# Altium PCB BLDC1.PcbDoc
Units mil, origin at the board's own origin, x right, y up, seen from the top; angles counter-clockwise.
Board outline 6000 x 4000 mil, 2 copper layers (Top Layer, Bottom Layer); 92 components, 65 nets, 304 pads, 249 vias.
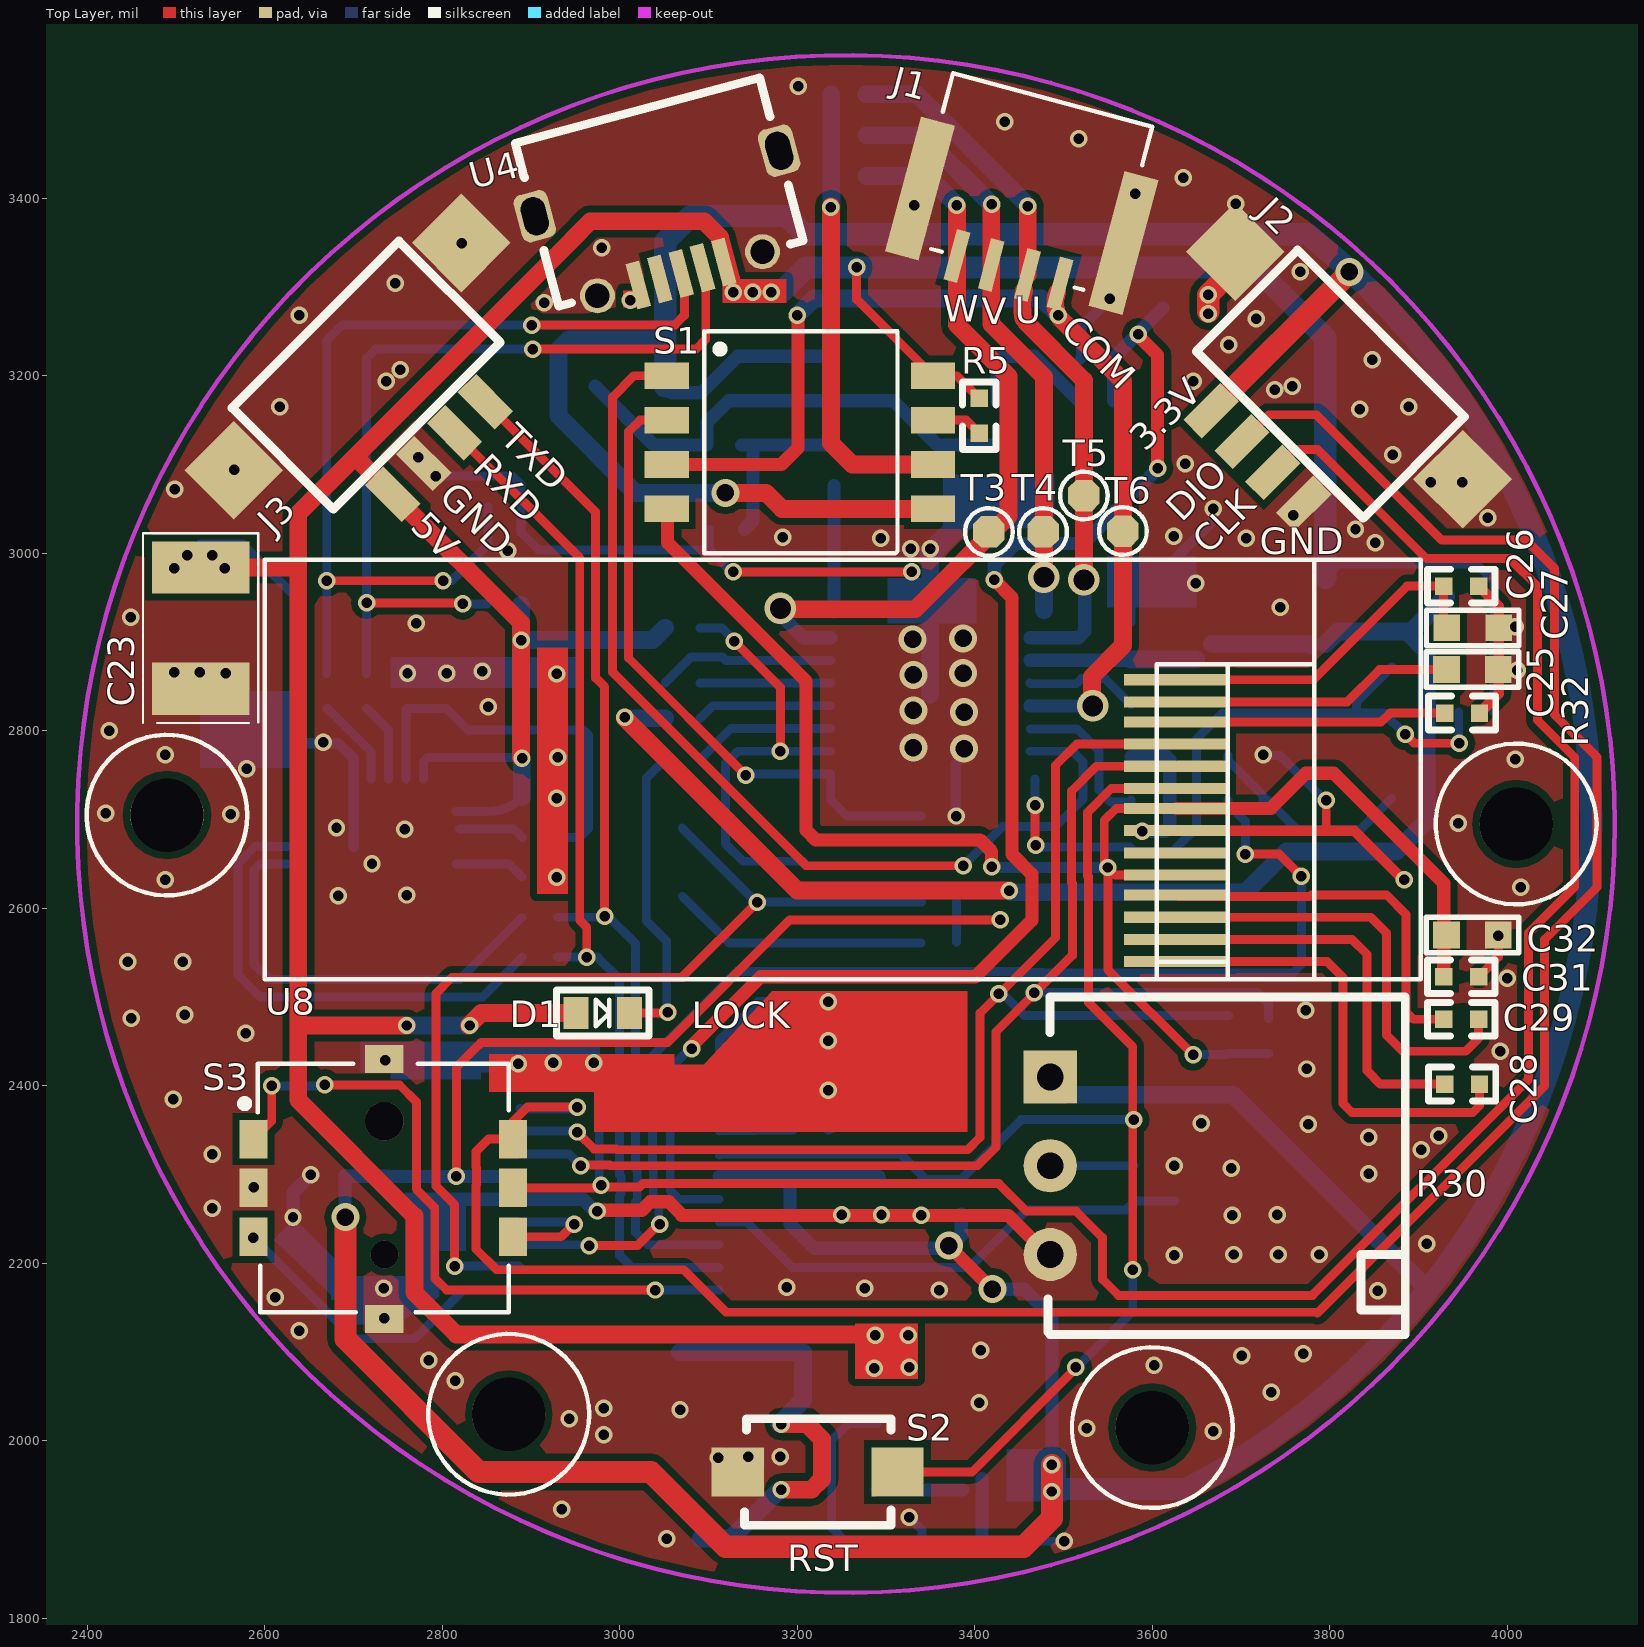
[diagram p0: Top Layer view]
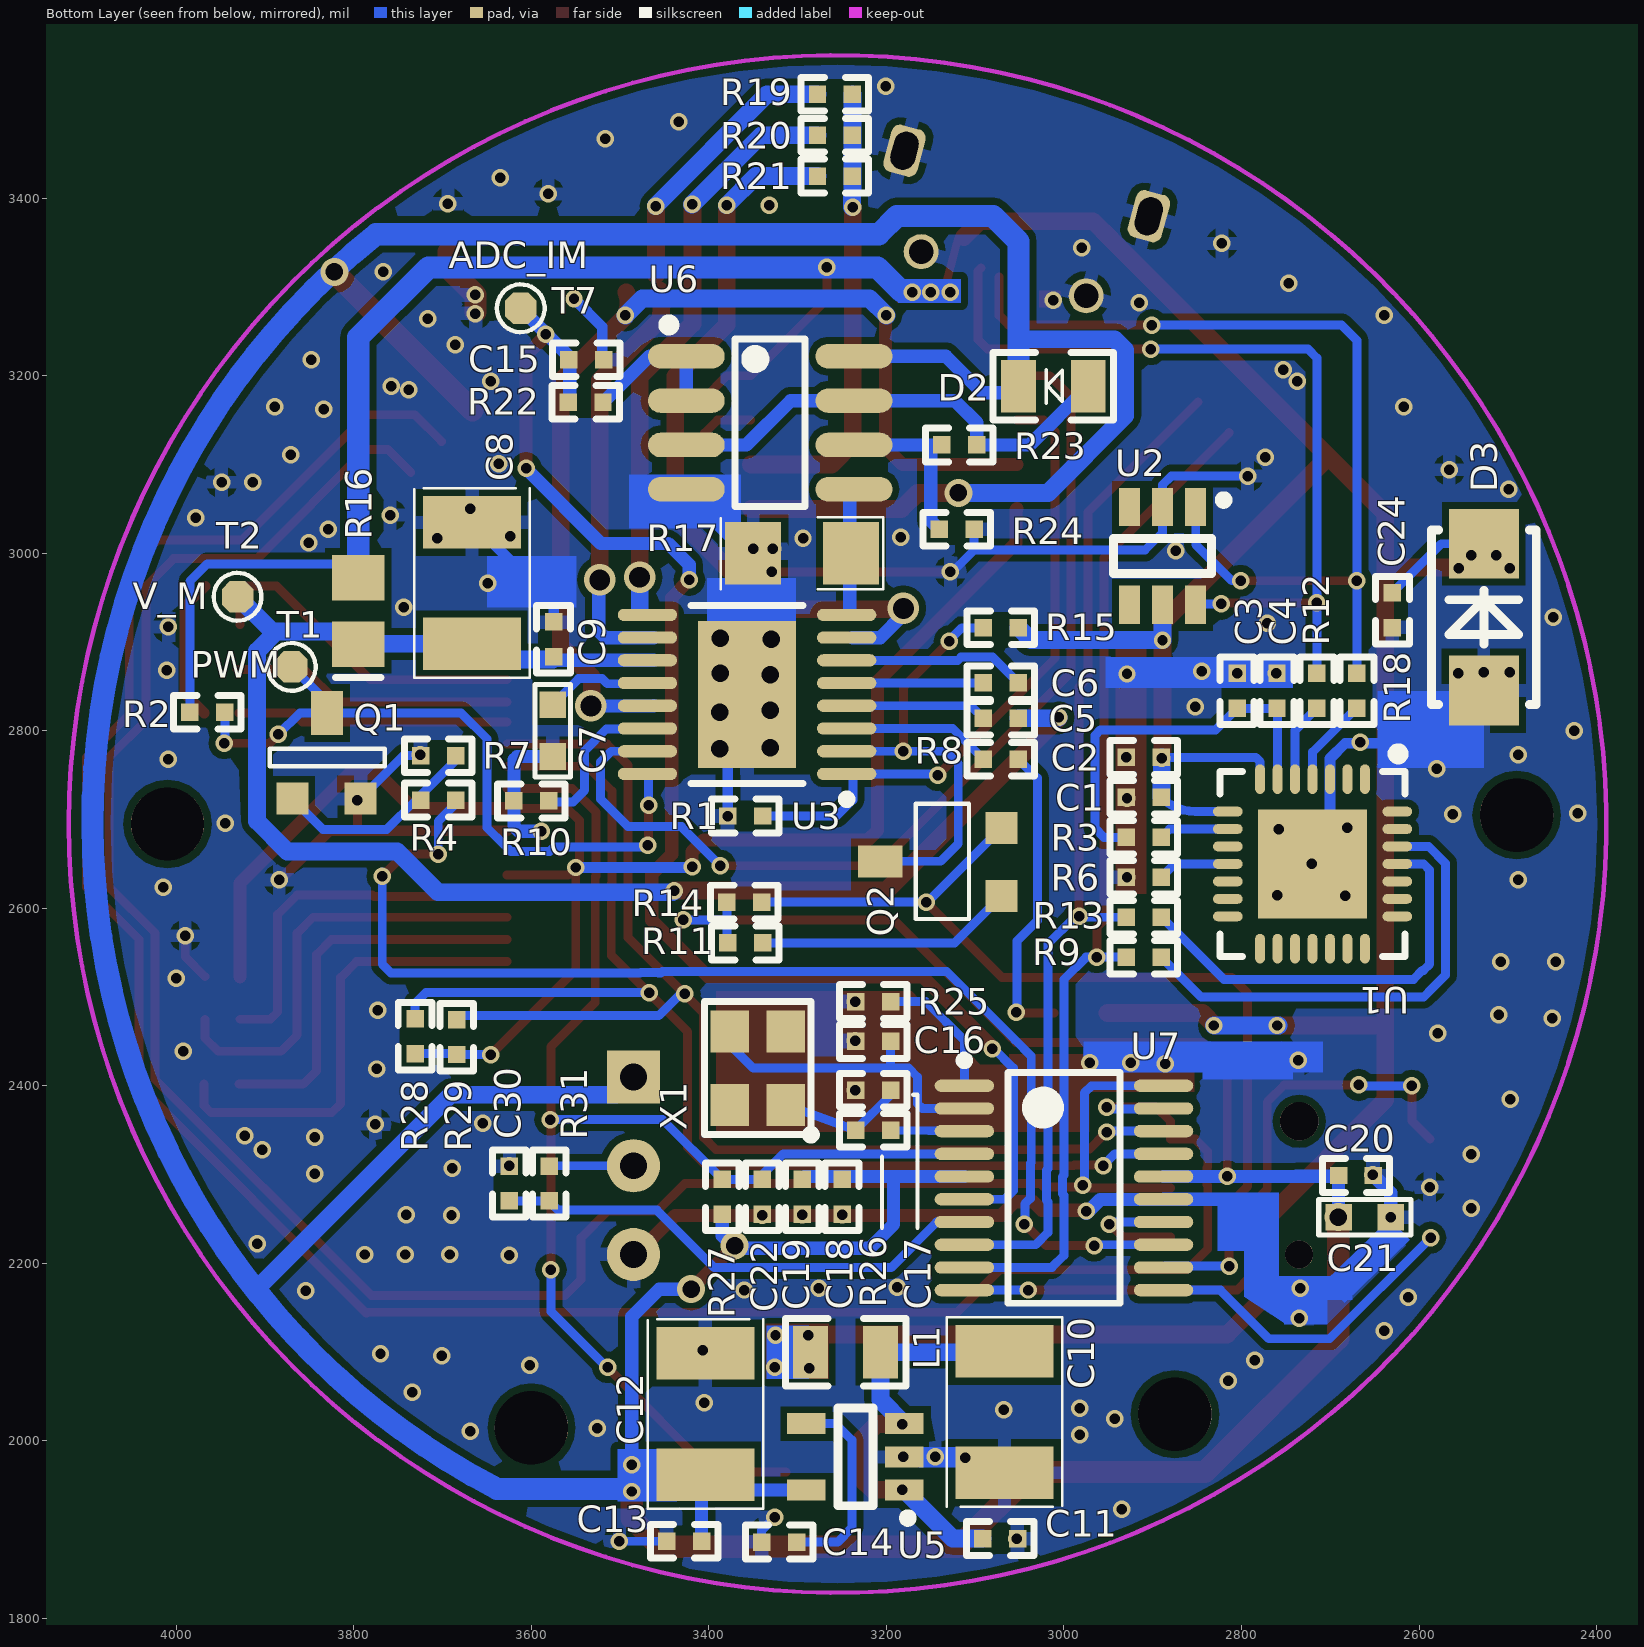
[diagram p1: Bottom Layer view, seen from below]

## Layer stack, top to bottom
Top Layer: signal copper 1.4
Dielectric: dielectric 12.6, FR-4, Dk 4.8
Bottom Layer: signal copper 1.4

## Board outline
1000,1000 7000,1000 7000,5000 1000,5000

## Design rules (kind name [scope] priority, off if disabled: settings)
Clearance [All] p1: gap=8
PlaneConnect [All] p1: planeconnectstyle=Direct reliefexpansion=20 reliefentries=4 reliefconductorwidth=15 reliefairgap=10
PolygonConnect [All] p1: connectstyle=Direct reliefconductorwidth=15 reliefentries=4 polygonreliefangle="90 Angle"
RoutingVias [All] p1: holewidth=28 width=50 viastyle="Through Hole" minholewidth=28 minwidth=50 maxholewidth=28 maxwidth=50
SilkscreenOverComponentPads [All] p1: minsilkscreentomaskgap=10
SolderMaskExpansion [All] p1: expansion=4
TestPointUsage [All] p1: valid=0 allowmultiple=FALSE
Testpoint [All] p1: side=15 testpointundercomponent=TRUE minsize=40 maxsize=100 preferedsize=60 minholesize=0 maxholesize=40 preferedholesize=32 testpointgrid=1 style=1023 order=0-112345678
Width [All] p1: maxlimit=50 minlimit=8 preferedwidth=10
22 further rules are at their usual default settings.

## Components (designator, comment, footprint, x,y, rotation, side; value= is the part's Value field where it differs from the comment)
C1 "Cap1" C0402 2910,2725 r180 bottom
C2 "Cap1" C0402 2910,2770 r180 bottom
C3 "Cap1" C0402 2805,2845 r270 bottom
C4 "Cap1" C0402 2760,2845 r270 bottom
C5 "Cap1" C0402 3071,2814 r180 bottom
C6 "Cap1" C0402 3071,2854 r180 bottom
C7 "Cap1" 0603 3576,2798 r90 bottom
C8 "Cap_Pol" 3528(22u16V钽电容) 3667,2898 r0 bottom
C9 "Cap1" C0402 3575,2903 r270 bottom
C10 "Cap_Pol" 3528(22u16V钽电容) 3067,2101 r180 bottom
C11 "Cap1" C0402 3072,1890 r0 bottom
C12 "Cap_Pol" 3528(22u16V钽电容) 3404,1962 r0 bottom
C13 "Cap1" C0402 3428,1887 r180 bottom
C14 "Cap1" C0402 3321,1886 r180 bottom
C15 "Cap1" C0402 3538,3218 r0 bottom
C16 "Cap1" C0402 3215,2450 r180 bottom
C17 "Cap1" C0402 3215,2395 r180 bottom
C18 "Cap1" C0402 3250,2275 r90 bottom
C19 "Cap1" C0402 3295,2275 r90 bottom
C20 "Cap1" C0402 2671,2299 r0 bottom
C21 "Cap1" 0603 2659,2252 r0 bottom
C22 "Cap1" C0402 3340,2275 r90 bottom
C23 "Cap_Pol" 3528(22u16V钽电容) 2528,2984 r0 top
C24 "Cap1" C0402 2630,2936 r90 bottom
C25 "Cap1" 0603 3963,2869 r180 top
C26 "Cap1" C0402 3948,2963 r0 top
C27 "Cap1" 0603 3959,2916 r0 top
C28 "Cap1" C0402 3949,2402 r180 top
C29 "Cap1" C0402 3948,2475 r0 top
C30 "Cap1" C0402 3625,2290 r270 bottom
C31 "Cap1" C0402 3948,2523 r180 top
C32 "Cap1" 0603 3963,2570 r180 top
D1 "LED" DIODE-12 2981,2482 r0 top
D2 "S4" Diode-0805 3012,3188 r0 bottom
D3 "SS34" LC-SMA(DO-214AC)_S2 2527,2928 r270 bottom
J1 "SH1.0mm 4P" "SH1.0 4P" 3380,3335 r345 top
J2 "MH1.25*4" MH1.25*4立式表贴 3770,3160 r135 top locked
J3 "MH1.25*4" MH1.25*4立式表贴 2745,3170 r225 top locked
L1 "BLM18" CC0805 3246,2100 r180 bottom
Q1 "8050" SOT-23-3 3830,2820 r180 bottom
Q2 "NMOS AO3400" "SOT-23-3 - AO3400" 3167,2653 r90 bottom
R1 "Res1" C0402 3359,2704 r180 bottom
R2 "Res1" C0402 3965,2821 r0 bottom
R3 "Res1" C0402 2910,2680 r0 bottom
R4 "Res1" C0402 3705,2722 r0 bottom
R5 "Res1" C0402 3405,3155 r270 top
R6 "Res1" C0402 2910,2635 r0 bottom
R7 "Res1" C0402 3705,2772 r180 bottom
R8 "Res1" C0402 3071,2768 r180 bottom
R9 "Res1" C0402 2910,2545 r0 bottom
R10 "Res1" C0402 3600,2721 r0 bottom
R11 "Res1" C0402 3359,2561 r180 bottom
R12 "Res1" C0402 2715,2845 r270 bottom
R13 "Res1" C0402 2910,2590 r0 bottom
R14 "Res1" C0402 3360,2607 r0 bottom
R15 "Res1" C0402 3071,2916 r180 bottom
R16 "Res1" C0805 3795,2935 r90 bottom
R17 "Res1" 3216[1206] 3295,3000 r0 bottom
R18 "Res1" C0402 2670,2845 r270 bottom
R19 "Res1" C0402 3258,3517 r180 bottom
R20 "Res1" C0402 3258,3471 r180 bottom
R21 "Res1" C0402 3258,3425 r180 bottom
R22 "Res1" C0402 3539,3170 r180 bottom
R23 "Res1" C0402 3118,3122 r0 bottom
R24 "Res1" C0402 3121,3027 r180 bottom
R25 "Res1" C0402 3215,2495 r0 bottom
R26 "Res1" C0402 3215,2350 r0 bottom
R27 "Res1" C0402 3385,2275 r90 bottom
R28 "Res1" C0402 3731,2456 r270 bottom
R29 "Res1" C0402 3684,2455 r270 bottom
R30 "10k 3296W" "3296W 卧式" 3485,2410 r0 top locked
R31 "Res1" C0402 3580,2290 r90 bottom
R32 "Res1" C0402 3949,2820 r0 top
S1 "拨码开关4路 1.27mm" 拨码开关4路 3053,3200 r0 top locked
S2 "SW-3*4mm" SW-3*4mm 3143,2025 r0 top
S3 "五向开关" 五向开关 2735,2285 r0 top locked
T1 "TEST" TEST 3870,2872 r180 bottom
T2 "TEST" TEST 3931,2951 r180 bottom
T3 "TEST" TEST 3416,3024 r0 top
T4 "TEST" TEST 3477,3024 r0 top
T5 "TEST" TEST 3523,3065 r0 top
T6 "TEST" TEST 3567,3025 r0 top
T7 "TEST" TEST 3612,3276 r180 bottom
U1 "CP2102" LC-QFN-28_5x5x05P 2720,2650 r0 bottom
U2 "SRV05-4.TCT" LC-SOT-23-6 2889,2997 r90 bottom
U3 "DRV11873" HTSSOP16 3357,2841 r0 bottom
U4 "Micro-USB-N" Micro-USB-N 2975,3290 r15 top
U5 "SP6205EM5-3-3" LC-SOT-23-5 3235,1982 r180 bottom
U6 "LM358" LC-SOIC-8 3331,3147 r270 bottom
U7 "STM32F030F4P6" TSSOP20 3000,2285 r180 bottom
U8 "OLED 128*32 0.91inch" "OLED 0.91 I2C" 2600,2520 r0 top locked
X1 "8M" XTAL-3225 3345,2420 r270 bottom

## Footprints (in the part's own frame and the unit in brackets; to place one, negate y for a bottom-side part, rotate by r counter-clockwise, add the part's x,y. Pads: shape width x height; smd on the part's side, far side on the other; paste and mask are expansions set on the pad)
0603 [mil]
  rect 30x30 smd: 1(-27,0) 2(31.5,0)
  silkscreen extent -50,-20 54,20
3216[1206] [mm] "Chip Resistor; Body 3.2 x 1.6 mm (LxW typ)"
  rect 1.6x1.8 smd: 1(-1.4,0) 2(1.4,0)
  silkscreen extent -2.32,-1.02 2.32,1.02
"3296W 卧式" [mil] "3296W带长柄"
  rect 60x60 hole 30: 1(0,0)
  round 60 hole 30: 2(0,-100) 3(0,-200)
  silkscreen extent -3,-290 400,90
3528(22u16V钽电容) [mm]
  rect 2.8x1.5 smd: 1(0,0) 2(0,-3.475)
  silkscreen extent -1.65,-4.45 1.65,0.97
C0402 [mm]
  rect 0.5x0.5 smd: 1(-0.5,0) 2(0.5,0)
  silkscreen extent -0.97,-0.48 0.97,0.48, body extent -0.74,-0.25 0.74,0.25, height 0.5
C0805 [mm] "Chip Capacitor; Body 2.0 x 1.2 mm (LxW typ)"
  rect 1.3x1.5 smd: 1(-0.95,0) 2(0.95,0)
  silkscreen extent -1.9,-0.65 -1.9,0.65
CC0805 [mm]
  rect 1x1.5 smd: 1(-1,0) 2(1,0)
  silkscreen extent -1.73,-0.97 1.73,0.97, body extent -1.37,-0.79 1.37,0.79, height 1.25
DIODE-12 [mil]
  rect 28.04x36 smd: 1(-30,0)
  rect 28.03x36 smd: 2(30,0)
  silkscreen extent -52,-26 52,26, body extent -44,-18 44,18, height 30
Diode-0805 [mm]
  rect 1x1.5 smd: 1(-1,0) 2(1,0)
  silkscreen extent -1.73,-0.97 1.73,0.97, body extent -1.37,-0.79 1.37,0.79, height 1.25
HTSSOP16 [mm] "TSOP, 16-Leads, Body 5.1x4.5mm (max), Pitch 0.65mm, IPC Medium Density"
  oval 1.7x0.35 smd: 1(-2.85,2.275) 2(-2.85,1.625) 3(-2.85,0.975) 4(-2.85,0.325) 5(-2.85,-0.325) 6(-2.85,-0.975) 7(-2.85,-1.625) 8(-2.85,-2.275) 9(2.85,-2.275) 10(2.85,-1.625) 11(2.85,-0.975) 12(2.85,-0.325) 13(2.85,0.325) 14(2.85,0.975) 15(2.85,1.625) 16(2.85,2.275)
  rect 2.8x4.2 smd: 17(0,0)
  silkscreen extent -2.97,-2.55 1.6,3.12
LC-QFN-28_5x5x05P [mm]
  rect 3.13x3.13 smd mask+0.051: 0(0,0)
  oval 0.28x0.85 smd mask+0.051: 1(-1.5,-2.425) 2(-1,-2.425) 3(-0.5,-2.425) 4(0,-2.425) 5(0.5,-2.425) 6(1,-2.425) 7(1.5,-2.425) 15(1.5,2.425) 16(1,2.425) 17(0.5,2.425) 18(0,2.425) 19(-0.5,2.425) 20(-1,2.425) 21(-1.5,2.425)
  oval 0.85x0.28 smd mask+0.051: 8(2.425,-1.5) 9(2.425,-1) 10(2.425,-0.5) 11(2.425,0) 12(2.425,0.5) 13(2.425,1) 14(2.425,1.5) 22(-2.425,1.5) 23(-2.425,1) 24(-2.425,0.5) 25(-2.425,0) 26(-2.425,-0.5) 27(-2.425,-1) 28(-2.425,-1.5)
  silkscreen extent -2.65,-3.3 2.65,2.65
LC-SMA(DO-214AC)_S2 [mm]
  rect 2x2 smd: 1(2.1,0) 2(-2.1,0)
  silkscreen extent -2.5,-1.5 2.5,1.5
LC-SOIC-8 [mm]
  oval 0.7x2.2 smd: 1(-1.905,-2.4) 2(-0.635,-2.4) 3(0.635,-2.4) 4(1.905,-2.4) 5(1.905,2.4) 6(0.635,2.4) 7(-0.635,2.4) 8(-1.905,2.4)
  silkscreen extent -2.95,-3.05 2.4,1
LC-SOT-23-5 [mm]
  rect 1.1x0.6 smd: 1(1.4,-0.95) 2(1.4,0) 3(1.4,0.95) 4(-1.4,0.95) 5(-1.4,-0.95)
  silkscreen extent -0.5,-1.87 1.62,1.4
LC-SOT-23-6 [mm]
  rect 1.1x0.6 smd: 1(1.4,-0.95) 2(1.4,0) 3(1.4,0.95) 4(-1.4,0.95) 5(-1.4,0) 6(-1.4,-0.95)
  silkscreen extent -0.5,-1.87 1.72,1.4
MH1.25*4立式表贴 [mm]
  rect 0.75x1.5 smd: 1(1.875,1.85) 2(0.625,1.85) 3(-0.625,1.85) 4(-1.875,1.85)
  rect 2x2 smd: 5(-4.6,-1.85) 6(4.6,-1.85)
  silkscreen extent -3.37,-3.15 3.38,0.95, body extent -3.37,-3.85 3.37,1.85, height 3
Micro-USB-N [mm]
  rect 0.4x1.35 smd: 1(3.746,0) 2(3.111,0) 3(2.477,0) 4(1.842,0) 5(1.207,0)
  rrect50% 1x1.4 hole 0.7 slot 1.1 at 90 deg: 6(-1.143,2.667) 7(6.096,2.667)
  round 1 hole 0.7: 8(0,0) 9(4.89,0)
  silkscreen extent -1.14,0 6.1,4.83
"OLED 0.91 I2C" [mil]
  rect 118.11x12.6 smd: 1(1027.5,20) 2(1027.5,45) 3(1027.5,70) 4(1027.5,95) 5(1027.5,117.5) 6(1027.5,142.5) 7(1027.5,167.5) 8(1027.5,192.5) 9(1027.5,215) 10(1027.5,240) 11(1027.5,265) 12(1027.5,290) 13(1027.5,312.5) 14(1027.5,337.5)
  silkscreen extent 0,0 1302,472
"SH1.0 4P" [mm]
  rect 0.4x1.5 smd: 1(0,0) 2(1.016,0) 3(2.095,0) 4(3.048,0)
  rect 1x4 smd: 5(4.509,1.587) 6(-1.524,1.588)
  silkscreen extent -1.46,0 4.44,5.02
SOT-23-3 [mm]
  rect 0.915x0.915 smd: 1(0.95,-2.45) 2(-1,-2.45)
  rect 0.915x1.27 smd: 3(0,0)
  silkscreen extent -1.65,-1.52 1.65,-1.02
"SOT-23-3 - AO3400" [mm]
  rect 0.915x0.915 smd: 1(-1,-2.45) 3(0.95,-2.45)
  rect 0.915x1.27 smd: 2(0,1.016)
  silkscreen extent -1.65,-1.52 1.65,0
SW-3*4mm [mil]
  rect 59.06x55.12 smd: 1(-10,-60) 2(170,-60)
  silkscreen extent -2,-120 162,0
TEST [mm] "测试点"
  oct 0.9x0.9 smd: 1(0,0)
  silkscreen extent -0.68,-0.68 0.68,0.68
TSSOP20 [mm] "TSOP, 20-Leads, Body 6.6x6.6mm (max), Pitch 0.65mm, IPC Medium Density"
  oval 1.7x0.35 smd: 1(-2.85,2.925) 2(-2.85,2.275) 3(-2.85,1.625) 4(-2.85,0.975) 5(-2.85,0.325) 6(-2.85,-0.325) 7(-2.85,-0.975) 8(-2.85,-1.625) 9(-2.85,-2.275) 10(-2.85,-2.925) 11(2.85,-2.925) 12(2.85,-2.275) 13(2.85,-1.625) 14(2.85,-0.975) 15(2.85,-0.325) 16(2.85,0.325) 17(2.85,0.975) 18(2.85,1.625) 19(2.85,2.275) 20(2.85,2.925)
  silkscreen extent -2.98,-3.3 1.6,3.77, body extent -3.3,-3.3 3.3,3.3, height 1.2
XTAL-3225 [mm]
  rect 1.2x1.1 smd: 1(1.05,0.8) 2(-1.05,-0.8) 3(-1.05,0.8) 4(1.05,-0.8)
  silkscreen extent -1.91,-1.52 2.03,1.65, body extent -1.52,-1.27 1.52,1.27, height 1.2
五向开关 [mm]
  round 0.8 hole 0.8 unplated: 0(0,-1.905)
  round 1.1 hole 1.1 unplated: 0(0,1.905)
  rect 0.8x1.1 smd: 1(-3.746,1.397) 2(-3.746,0) 3(-3.746,-1.397) 4(3.683,-1.397) 5(3.683,0) 6(3.683,1.397)
  rect 1.1x0.8 smd: 7(0,3.683) 8(0,-3.746)
  silkscreen extent -4.09,-3.56 3.56,3.56
拨码开关4路 [mm] "1.27mm"
  rect 1.27x0.76 smd: 1(0,0) 2(7.62,0) 3(0,-1.27) 4(7.62,-1.27) 5(0,-2.54) 6(7.62,-2.54) 7(0,-3.81) 8(7.62,-3.81)
  silkscreen extent 1.08,-5.08 6.6,1.27

## Part data
C1 C2 C3 C4 C5 C6 C7 C8 C9 C10 C11 C12 C13 C14 C15 C16 C17 C18 C19 C20 C21 C22 C23 C24 C25 C26 C27 C28 C29 C30 C31 C32: "Capacitor"
D1: library part LED1, "Typical INFRARED GaAs LED"
D2 D3: library part Diode1
J2 J3: library part MH1.25*4卧式贴片
Q1: library part NPN
Q2: library part NMOS, "N-Channel Power MOSFET"
R1 R2 R3 R4 R5 R6 R7 R8 R9 R10 R11 R12 R13 R14 R15 R16 R17 R18 R19 R20 R21 R22 R23 R24 R25 R26 R27 R28 R29 R31 R32: "Resistor"
R30: library part Res_3296
S2 S3: "Switch"
U5: library part SP6205EM5-L-3-3
U8: library part "OLED 12832 I2C"
X1: library part XTAL_1, "Crystal Oscillator"

## Free pads (board coordinates)
  oval 82.68x78.74 hole 82.68 unplated: 1(3600,2015) 2(2875,2030) 3(2490,2705) 4(4010,2695)

## Via types
v1: diameter 19.68, hole 11.81, Top Layer to Bottom Layer, tented both sides, 232 vias
v2: diameter 31.5, hole 19.68, Top Layer to Bottom Layer, tented both sides, 13 vias
v3: diameter 35.43, hole 23.62, Top Layer to Bottom Layer, tented both sides, 4 vias

## Nets (pads, with @x,y where several pads share a name; then routed paths per layer and width w, separated by ;. In a path a pad name is that pad's centre, name@x,y a point inside that pad or via, vN(x,y) a via of type N, cw(c..) or ccw(c..) an arc to the next point about the centre after c; other vN are vias at no path point)
3.3V: C12.1 C13.2 C18.2 C19.2 C20.2 C21.2 D2.2 J2.1 R11.1 R14.2 R27.1 R30.1 S1.8 U5.5 U6.8 U7.5 U7.16 | length 7554.3
  Top Layer w10: v1(2816,2298) 2816,2421 2840.16,2445.16 2840.46,2445.16 2844.3,2449 3054,2449 3062,2457 ; 3055.7,2451 3191.7,2587 v1(3429,2587)
  Top Layer w15: v2(3371,2220) v2(3420,2171)
  Top Layer w20: v2(3119,3068) 3165,3068 3183,3050 S1.8
  Top Layer w25: v2@2691,2250 2691,2115.11 2841.12,1964.99 3035.01,1964.99 3119.22,1880.78 3455,1880.78 3487,1912.78 v1(3487,1943) v1(3487,1973) ; J2.1 v2@3820.8,3315.2
  Bottom Layer w10: C19.2@3291.89,2297.8 cw(c3291.89,2294.68) C19.2 ; R11.1@3379.68,2562 3379.68,2587 ; R14.2 3379.68,2587 ; v1@3430,2587 v1(3429,2587) 3379.68,2587
  Bottom Layer w15: C21.2@2690.68,2252.19 C20.2 2691.68,2298 2738.68,2298 2738.89,2297.8 U7.16 ; D2.2@3058.37,3181 3092,3181 3133,3222 U6.8 ; U7.5 3250,2297.8 C19.2@3291.89,2297.8 ; 3192,2296.8 3192,2244 3219,2217 3371,2217 3385,2231 R27.1 ; U5.5 C12.1@3386.6,1944.6 ; C13.2 C12.1@3408.32,1957.68 ; v2(3420,2171) 3456,2171 3487,2140 v1(3487,1973)
  Bottom Layer w20: 3051.37,3250 3042.37,3241 2943,3241 2931,3229 2931,3154.96 3017.96,3068 v2(3119,3068) ; R30.1 3505,2390 3691,2390 3909.5,2171.5
  Bottom Layer w25: D2.2 3051.37,3250 3051.37,3351.37 3080.01,3380.01 3187.99,3380.01 3208.6,3359.4 3775,3359.4 ; v1@3489.91,1945.91 3638.69,1945.91 ccw(c3248.1,2696.86) 3776.26,3358.33
  other v2: 2691,2252 3822,3317
5V: C1.2 C2.2 C23.1 C24.2 D1.1 D3.2 J3.1 L1.1 R2.2 R5.1 R15.2 R16.2 S1.2 U1.7 U1.8 U2.5 U4.1 | length 5067.4
  Top Layer w10: v1(3267,3322) 3267,3286 S1.2 3379.68,3200 R5.1
  Top Layer w20: C23.1 2638,2984 ; 2639,2468 v1(2760,2468) ; 2702.23,3108.38 J3.1 2889,2921.6 v1(2889,2902) v1@2889,2770 ; v1@2830,2468 2844,2482 D1.1 ; 3112.96,3355.96 3094.92,3374 2967,3374 2946.46,3353.46 2946.46,3353.22 2638,3044.75 2638,2984 ; v1@3322,2120 2816,2120 2768.75,2167.25 2768.75,2253.25 2638,2384 2638,2984
  Bottom Layer w10: D3.2 2575.01,3010.68 C24.2 ; U1.7 2779.06,2765.06 2784,2770 C2.2@2889.74,2770 ; U1.8 2851.82,2709.06 ccw(c2851.82,2763.49) C1.2 ; R16.2 3810.6,2988 3965,2988 3984.68,2968.32 R2.2
  Bottom Layer w20: v1@2758,2468 v1(2760,2468) v1(2831,2468) ; U2.5 v1(2889,2902) 2889.23,2902.23 3037.23,2902.23 3051,2916 R15.2 ; C2.2@2889.74,2770 C1.2@2890,2725
  Bottom Layer w25: v1@3174,3295 3183,3295 3210,3322 v1(3267,3322) 3716,3322 3795,3243 R16.2
  other v1: 3287,2082 3326,2083 3288,2119 3325,2119 2890,2769 2498,2983 2555,2983 2513,2998 2541,2998 3128,3294 3150,3294 3171,3294
ADC1: C30.2 R31.1 U7.7 | length 565.2
  Bottom Layer w10: U7.7 3143.42,2246.61 3194.78,2195.25 3393.95,2195.25 3458.7,2260 3569.68,2260 R31.1 C30.2
ADC_IM: C15.2 R22.1 T7.1 U7.6 | length 1610.5
  Top Layer w15: v1@3079,2443 3159,2523 3400.84,2523 3464.5,2586.66 3464.5,2638.5 3442,2661 3442,2950 v1(3422,2970) ; v1@3583,3246 3606,3223 v1(3606,3096)
  Bottom Layer w10: v1(3081,2442) 3080,2443 3057,2420 3057,2282 3066.8,2272.2 U7.6
  Bottom Layer w15: v1@3423,2970 v1(3422,2970) 3422,2987 3446,3011 3522,3011 v1@3606,3095 ; R22.1@3556.68,3172 3556.68,3221 3557,3221 T7.1
  other v1: 3584,3247
BOOT0: R25.1 U7.1 | length 152.3
  Bottom Layer w10: U7.1 3112.2,2451.2 3156,2495 R25.1
CAPTURE: Q2.3 R14.1 U7.12 | length 1099
  Top Layer w10: v1(2814,2197) 2814,2265.98 2793.16,2286.83 2793.16,2504.16 2811.16,2522.16 3070.16,2522.16 v1(3155,2607)
  Bottom Layer w10: v1(2814,2197) 2886.23,2197 U7.12 ; Q2.3 3153.94,2607 v1(3155,2607) R14.1
COM: J1.4 S1.5 T6.1 U3.13 | length 1196
  Top Layer w15: S1.5 3182,3100 3201,3119 v1@3201,3270
  Top Layer w20: J1.4@3493,3294 ccw(c3521.93,3282.16) v1@3495.13,3266.06 ; v1@3497,3264 3567,3194 T6.1 3567,2896 3532,2861 v3@3532,2828
  Bottom Layer w15: U3.13@3462.2,2828.2 3462.41,2828 v3(3533,2828)
  Bottom Layer w20: v1(3200,3268) 3219,3287 3475,3287 v1(3494,3268)
D+: R18.1 U2.1 U4.3 | length 1070.8
  Top Layer w10: v1(2670,2969) v1(2801,2969) ; v1@2903.31,3257.31 3062.31,3257.31 3073,3268 U4.3@3073,3311.41
  Bottom Layer w10: R18.1 v1(2670,2969) 2670,3240 2687,3257 v1(2901,3257) ; v1@2802,2969 2811,2969 2851.6,3009.6 U2.1
D-: R12.1 U2.6 U4.2 | length 970.7
  Top Layer w10: v1(2715,2944) v1@2826,2944 ; v1(2902,3230) 3086,3230 3097,3241 3097,3318.03 U4.2
  Bottom Layer w10: R12.1 v1(2715,2944) ; v1@2717.12,2941.88 v1(2715,2944) ; v1(2823,2943) U2.6@2850.48,2943 ; v1@2903,3230 v1(2902,3230) 2725,3230 2715,3220 v1(2715,2944)
DIR: S1.1 U3.15 | length 1170.3
  Top Layer w10: S1.1 3016,3200 2992,3176 2992,2866 3210,2648 v1(3387,2648)
  Bottom Layer w10: v1@3386,2647 v1(3387,2648) 3431,2692 3491,2692 3522,2723 3522,2765 3509.98,2777.02 U3.15 ; U3.15@3462.2,2777.02 U3.15 ; U3.15@3498.98,2777.02 U3.15
FG: Q2.2 R15.1 U3.2 | length 499.4
  Top Layer w10: v1(3129,2901) 3181,2849 v1(3181,2777) v1@3182,2776
  Bottom Layer w10: R15.1 3115,2916 v1@3128,2903 ; v1(3181,2777) 3133,2777 3119.16,2763.16 3119.16,2672.84 3139,2653 Q2.2 ; v1@3182.02,2777.02 U3.2@3237.8,2777.02
FS: R1.2 S1.3 U3.1 | length 723.1
  Top Layer w10: S1.3 3023,3150 3010,3137 3010,2882 v1(3142,2750)
  Bottom Layer w10: v1@3143,2751.43 3237.8,2751.43 3237.8,2722.2 3256,2704 R1.2
GND: C1.1 C2.1 C3.1 C4.1 C7.1 C8.2 C9.1 C10.2 C11.1 C12.2 C13.1 C14.1 C15.1 C16.1 C17.1 C18.1 C19.1 C20.1 C21.1 C22.1 C23.2 C24.1 C25.1 C26.2 C27.2 C30.1 C31.1 C32.1 D3.1 J1.5 J1.6 J2.4 J2.5 J2.6 J3.2 J3.5 J3.6 Q1.1 R1.1 R6.2 R7.1 R10.2 R17.2 R24.2 R25.2 R30.3 R32.2 S2.1 S3.2 S3.7 S3.8 U1.0 U1.3 U2.2 U4.5 U4.6 U4.7 U4.8 U4.9 U5.2 U6.4 U7.15 U8.7 | length 4207.8
  Top Layer w10: v1(2929,2635) v1(2929,2724) v1@2929,2769 ; v1(2930,2770) v1@2930,2869 ; v1@2972,2426 3003,2395 v1(3235,2395) v1(3235,2451) v1(3235,2495) ; v1(3128,2979) v1(3329,2979) ; 3796,2688.5 v1(3796,2722) ; C31.1 3990,2545.32 C32.1
  Top Layer w12: U8.7 3827.5,2687.5 v1@3884,2631 ; C26.2 3990.5,2940.19 C27.2 3990.5,2841.81 R32.2
  Top Layer w15: v1@2978,2260 3025.16,2260 3034.5,2269.34 3055.5,2269.34 3069.84,2255 ; 3069.84,2254 v1(3340,2254) 3438,2254 R30.3@3485,2207
  Top Layer w25: v1@3663,3272 v1(3663,3291) 3693.44,3321.44 J2.6
  Bottom Layer w10: v1(2736,2429) 2739,2426 v1(2971,2426) ; C4.1 C3.1 2928.32,2864.68 v1(2929,2864) ; v1(2793,3087) 2879,3087 2889,3077 U2.2 2889,3023.37 2908.68,3003.68 3101.32,3003.68 ; U7.15 U7.15@2888,2272 ; R24.2 3101.32,3003.68 ; v1@3129,2976 3101.32,3003.68 ; v1(3326,1914) 3340.68,1899.32 C14.1 ; C13.1 v1(3501,1887) ; R7.1 3744.14,2772 Q1.1
  Bottom Layer w12: D3.1 2586.32,2786 2683.13,2786 2700.32,2768.82 U1.3 U1.0@2700.32,2669.69 ; R1.1 3378.68,2763 ; C15.1 3520,3219.68 3520,3255 v1(3552,3287) ; C9.1 3575,2942.81 C8.2
  Bottom Layer w15: v1(2632,2252) 2632,2279.68 C20.1 ; 2817,2272.2 U7.15 ; U7.15@2888,2272 2959,2272 v1@2974.84,2256.16 ; C7.1 3616,2771 3619.68,2767.32 R10.2 3619.68,2692.68 3614,2687 v1(3589,2687)
  Bottom Layer w20: 3350,2841 R17.2@3350,2999.88
  Bottom Layer w25: R17.2 3422.12,3072 U6.4
  other v1: 3053,1890 2935,1923 3111,1981 3145,1982 3181,1982 2982,2007 3669,2011 3526,2014 2943,2025 3068,2035 2982,2037 3405,2043 3734,2055 2815,2068 3602,2085 2785,2091 3701,2096 3770,2098 3407,2102 2639,2124 2735,2138 2612,2162 3854,2169 3360,2170 2734,2172 3276,2172 3188,2173 3625,2209 3692,2210 3742,2210 3788,2210 3909,2222 3690,2254 3250,2255 3295,2255 3741,2255 2975,2259 2541,2262 2588,2286 2652,2300 3844,2301 3689,2307 3625,2310 2541,2323 3903,2328 3844,2342 3923,2344 3776,2357 3655,2358 2497,2385 3774,2419 2886,2425 2925,2426 3992,2439 2579,2459 2450,2476 2510,2480 3773,2485 4000,2521 2446,2540 2508,2540 3990,2569 2683,2614 2760,2615 4015,2624 2488,2632 3884,2632 2721,2650 2758,2689 2681,2691 3945,2696 3379,2704 2562,2706 2421,2707 2580,2757 4009,2768 2488,2773 3725,2773 2666,2787 2425,2800 2852,2827 2556,2865 2761,2865 2805,2865 2498,2866 2527,2866 2845,2867 4011,2868 4009,2917 2771,2921 2449,2928 3744,2939 3649,2966 2874,3003 3328,3005 3350,3005 3851,3012 3294,3017 3706,3017 3184,3018 3624,3019 3829,3027 3978,3040 3759,3043 3669,3050 2499,3072 3914,3080 3949,3080 2566,3094 3637,3101 2773,3108 3871,3111 3834,3162 2617,3165 3889,3165 3738,3184 3758,3188 2737,3194 3646,3194 2753,3207 3848,3218 3686,3235 3717,3264 2639,3268 3663,3270 2915,3282 3012,3285 2747,3304 3767,3317 2980,3344 2822,3349 3332,3392 3694,3394 3581,3405 3635,3423 3517,3467 3434,3486 3201,3526
  other v2: 3388,2780 3331,2781 3388,2821 3331,2823 3331,2863 3387,2865 3330,2903 3387,2904
IM: R17.1 U3.8 U6.5 | length 141.7
  Bottom Layer w15: U3.8@3241.51,2934.28 U6.5@3241.51,3076
KEYA: S3.1 U7.10 | length 772.7
  Top Layer w10: S3.1 2608,2360.5 v1(2608,2400) ; v1(2668,2401) 2752,2401 2771,2382 2771,2283.53 2791.75,2262.78 2791.75,2183.25 2805,2170 v1(3040,2170)
  Bottom Layer w10: v1(2608,2400) v1@2668,2400 ; v1(3040,2170) 3040.16,2169.84 U7.10
KEYB: S3.3 U7.11 | length 370.6
  Bottom Layer w10: v1(2587,2229) 2700.84,2115.16 2769.16,2115.16 2823.84,2169.84 U7.11
KEYC: S3.4 U7.14 | length 147
  Top Layer w10: S3.4 2934,2230 v1@2952,2248
  Bottom Layer w10: U7.14 2951.61,2246.61 v1(2949,2244)
KEYCENTER: J2.3 S3.5 U7.20 | length 2493.7
  Top Layer w10: S3.5 2973,2285 2976.6,2286.8 v1@2977,2287 ; v1(2979,2288) 2977,2286 3022.17,2286 3026.01,2289.84 3427.16,2289.84 3458,2259 3514,2259 3544,2229 3544,2182 3562,2164 3780.46,2164 4024.02,2407.56 4024.02,2572.35 4076,2624.33 4076,2769.88 4034,2811.88 4034,2963 4003,2994 3909,2994 3786,3117 3761.8,3117 J2.3
  Bottom Layer w10: U7.20 2968.84,2400.16 2977,2392 2977,2312 ; v1@2977,2287 2977,2311.68
KEYD: J2.2 S3.6 U7.19 | length 2725.7
  Top Layer w10: v1(2952,2376) 2896,2376 2880,2360 S3.6 2852,2340 2838,2326 2838,2308.3 2838.84,2307.46 2838.84,2288.54 2838,2287.7 2838,2216.21 2861.37,2192.84 3072.16,2192.84 3120,2145 3784.91,2145 3785.91,2144 4042.02,2400.11 4042.02,2564.9 4101.17,2624.05 4101.17,2770.17 4053,2818.34 4053,2983 4021.24,3014.76 3926.24,3014.76 3785,3156 3731.2,3156 J2.2
  Bottom Layer w10: U7.19 2888.36,2374 v1@2953,2374
NetC3_2: C3.2 C4.2 R3.2 U1.6 | length 438.7
  Bottom Layer w10: U1.6 C4.2@2759.37,2824.69 ; C4.2@2760.32,2825 C4.2 C3.2 ; C3.2@2807,2823 2829,2801 2959,2801 2965,2795 2965,2690 2955,2680 R3.2
NetC5_1: C5.1 U3.4 | length 153
  Bottom Layer w10: C5.1 3104.89,2828.2 U3.4@3237.8,2828.2
NetC6_1: C6.1 U3.5 | length 147.2
  Bottom Layer w10: C6.1 3237.59,2854 U3.5@3237.8,2853.8
NetC6_2: C6.2 U3.6 | length 200.3
  Bottom Layer w10: C6.2 3080.32,2883 3116,2883 3120,2879 3237.41,2879 U3.6@3237.8,2879.39
NetC7_2: C7.2 U3.12 | length 128.6
  Bottom Layer w10: U3.12@3462.2,2853.8 3463,2853 3514.56,2853 3520.28,2858.72 3546.78,2858.72 C7.2
NetC10_1: C10.1 C11.2 L1.2 U5.1 U5.3 | length 490.1
  Top Layer w20: v1(3182,1945) 3216,1945 3228,1957 3228,2002 3211,2019 v1(3182,2019)
  Bottom Layer w20: C10.1@3068,2100 L1.2 3206.63,2046.15 U5.3 ; C11.2 3125.28,1890 U5.1
NetC14_2: C14.2 U5.4 | length 226.7
  Bottom Layer w10: U5.4 3257.4,2019.4 3239,2001 3239,1902 3255,1886 C14.2
NetC17_2: C17.2 R26.2 X1.1 | length 145.2
  Bottom Layer w10: C17.2 3195.32,2389.68 3234.68,2350.32 R26.2 X1.1
NetC25_2: C25.2 U8.13 | length 319.1
  Top Layer w10: U8.13 3819.5,2832.5 3856,2869 C25.2
NetC26_1: C26.1 C27.1 U8.14 | length 387.8
  Top Layer w10: U8.14 3781.5,2857.5 3887,2963 C26.1 C27.1@3928.32,2919.68
NetC28_1: C28.1 U8.1 | length 522.3
  Top Layer w10: U8.1 3797,2540 3815,2522 3815,2380 3825,2370 3961,2370 3968.68,2377.68 C28.1
NetC28_2: C28.2 U8.2 | length 446.1
  Top Layer w10: U8.2 3825,2565 3842,2548 3842,2417 3857,2402 C28.2
NetC29_1: C29.1 U8.4 | length 424.8
  Top Layer w10: U8.4 3629.34,2613.16 3777.46,2613.16 3779.3,2615 3864,2615 3886,2593 3886,2483 3894,2475 C29.1
NetC29_2: C29.2 U8.3 | length 497.5
  Top Layer w10: U8.3 3846,2590 3864,2572 3864,2457 3882,2439 3953,2439 3967.68,2453.68 C29.2
NetD1_2: D1.2 R8.2 | length 345.4
  Top Layer w10: D1.2 v1@3053,2482
  Bottom Layer w10: R8.2 3030,2746.68 3030,2586 3053,2563 v1@3053,2483
  other v1: 3054,2483
NetQ1_2: Q1.2 R4.2 R7.2 | length 239
  Bottom Layer w10: R7.2 3685.32,2766.68 3724.68,2727.32 R4.2 3730,2722 3763,2689 3834.83,2689 Q1.2
NetQ2_1: Q2.1 R11.2 | length 290.6
  Bottom Layer w10: Q2.1 3123.17,2561 R11.2
NetR3_1: R3.1 U1.9 | length 74.7
  Bottom Layer w10: U1.9@2819.48,2689.37 2880.95,2689.37 R3.1
NetR5_2: R5.2 S1.4 | length 58.1
  Top Layer w10: S1.4 3390.32,3150 R5.2
NetR6_1: R6.1 U1.11 | length 81.1
  Bottom Layer w10: U1.11 2875.32,2650 R6.1
NetR8_1: R8.1 U3.3 | length 161.4
  Bottom Layer w10: R8.1 3125.3,2802.61 U3.3@3237.8,2802.61
NetR9_1: R9.1 U1.26 | length 537.3
  Bottom Layer w10: U1.26 2589.23,2669.68 2570,2650.46 2570,2525 2585,2510 2595,2500 2845.32,2500 R9.1
NetR10_1: R10.1 U3.14 | length 175.5
  Bottom Layer w10: U3.14@3463,2802 3515.56,2802 3540,2777.56 3540,2733 3553.32,2719.68 3576,2719.68 R10.1@3576,2722
NetR12_2: R12.2 U1.5 | length 90.1
  Bottom Layer w10: R12.2 2739.69,2800.63 U1.5
NetR13_1: R13.1 U1.25 | length 483.8
  Bottom Layer w10: U1.25 2595,2650 2588,2643 2588,2537 2594.97,2530.03 2596.17,2530.03 2606.19,2520 2820,2520 2890,2590 R13.1
NetR18_2: R18.2 U1.4 | length 101
  Bottom Layer w10: R18.2 2670.68,2825.32 2720,2776 U1.4
NetR19_2: R19.2 R20.2 R21.2 S1.6 | length 518.9
  Top Layer w20: v1@3238,3391 3238,3124 3262,3100 S1.6
  Bottom Layer w20: R19.2 R20.2 R21.2 v1@3238.68,3390.01
  other v1: 3238,3390
NetR23_2: R23.2 R24.1 U6.6 | length 198.7
  Bottom Layer w15: R23.2 3148,3122 ; R24.1 3150.25,3036.56 3150.25,3119.75 3148,3122 ; U6.6 3148,3122
NetR30_2: R30.2 R31.2 | length 94.7
  Bottom Layer w10: R30.2 R31.2@3579.68,2310
NetR32_1: R32.1 U8.12 | length 306
  Top Layer w10: U8.12 3858,2810 3868,2820 R32.1
NRST: C22.2 R27.2 S2.2 U7.4 U8.9 | length 1530.5
  Top Layer w10: S2.2 3397,1965 v1@3512.5,2080.5 ; v1@3578,2194 3578,2444 3528,2494 3528,2635.7 3527.16,2636.54 3527.16,2708.16 3554,2735 U8.9
  Bottom Layer w10: U7.4@3112.2,2322.16 U7.4 3316.3,2323.39 3345,2294.68 R27.2 3452.32,2362 v1(3579,2362) ; v1@3516,2084 3578,2146 v1@3578,2187
  other v1: 3514,2083 3578,2193
OLED_VDD: C31.2 C32.2 R28.2 R29.2 S1.7 U8.5 U8.8 | length 1825.4
  Top Layer w10: U8.5 3558.5,2637.5 v1(3550,2646) ; U8.8 3559.5,2712.5 3546,2699 3546,2650 v1(3550,2646) ; v1@3647,2435 v1(3646,2435) 3550,2531 v1(3550,2646)
  Top Layer w15: S1.7 3054,3049 3054,3011.84 3210,2855.84 3210,2688 3221,2677 3406,2677 3419,2664 v1(3419,2647) ; v1@3417,2647 v1(3419,2647) ; v1@3421,2647 v1(3419,2647) ; U8.8 3733.5,2712.5 3773,2752 3804.67,2752 3928.32,2628.35 C31.2
  Bottom Layer w10: v1(3646,2435) 3646.32,2435.32 R29.2 ; R29.2@3685,2436.32 R28.2
  Bottom Layer w12: v1@3424,2646 v1(3550,2646)
OSC_IN: C16.2 U7.2 X1.2 | length 365.4
  Bottom Layer w10: U7.2 3159.57,2374.57 3165,2380 3165,2410 3175,2420 3350,2420 3376.5,2446.5 X1.2 ; 3195.32,2420.32 C16.2 ; X1.2@3376.5,2451.5 X1.2@3376.5,2460.67
OSC_OUT: R26.1 U7.3 | length 83.1
  Bottom Layer w10: U7.3 R26.1
OUTA: R22.2 U6.1 U6.2 | length 165.1
  Bottom Layer w15: U6.2 U6.1 3467,3222 R22.2@3519,3170
OUTB: D2.1 R23.1 U6.3 U6.7 | length 536.4
  Bottom Layer w15: D2.1 3038.63,3122 R23.1 3098.32,3147.32 3123,3172 U6.7 3308,3172 3358,3122 U6.3
PWM: R4.1 U7.13 | length 1383.7
  Top Layer w10: v1(2966,2220) 3020,2220 v1@3043.5,2243.5 ; v1(3705,2661) 3743,2661 v1(3768,2636)
  Bottom Layer w10: U7.13 v1@2967.98,2221.02 ; v1@3044,2243 3044,2267 3037.84,2273.16 3037.84,2312.37 3036.84,2313.37 3036.84,2433.54 3055.15,2451.85 3132.15,2528.84 3452.46,2528.84 3454.3,2527 3456.7,2527 3457.54,2527.84 3476.46,2527.84 3477.3,2527 3758,2527 3768,2537 v1(3768,2636) v1@3768,2641 ; R4.1 3685.32,2717.68 3705,2698 v1(3705,2661)
  other v1: 3045,2244
PWMIN: Q1.3 R2.1 T1.1 U3.16 | length 789.5
  Top Layer w10: v1@3468,2670 v1@3468,2714 ; v1@3886,2795 3895,2786 v1(3946,2786)
  Bottom Layer w10: v1(3468,2716) U3.16@3468,2745.64 ; v1@3469,2669 3574.7,2669 3579.54,2664.16 3623.16,2664.16 3628,2669 ; 3630,2671 3650,2691 3650,2791 3679,2820 Q1.3 ; T1.1 3830,2832 Q1.3 ; v1(3885,2796) 3861,2820 Q1.3 ; v1@3945.32,2785.68 R2.1
  other v1: 3469,2671
SCL: R28.1 U7.17 U8.10 | length 1405.7
  Top Layer w10: v1@2957,2310 2957.84,2310.84 2988.46,2310.84 2989.3,2310 3403,2310 3424,2331 3424,2461 3510,2547 3510,2628.24 3509.16,2629.08 3509.16,2732.16 3537,2760 U8.10
  Bottom Layer w10: U7.17@2889.41,2325 U7.17 2942.61,2323.39 v1(2956,2310) ; v1(3467,2505) 3719,2505 3731,2493 R28.1
SDA: R29.1 U7.18 U8.11 | length 1398.6
  Top Layer w10: v1@2954,2346 2971.16,2328.84 2995.92,2328.84 2996.76,2328 3392,2328 3406,2342 3406,2482 3491,2567 3491,2761 3515,2785 U8.11
  Bottom Layer w10: U7.18 v1@2951.02,2348.98 ; v1(3427,2504) 3431.7,2504 3456.54,2479.16 R29.1@3686.16,2479.16
  other v1: 2952,2348
U: J1.3 R19.1 T5.1 U3.10 | length 784.4
  Top Layer w20: 3454.8,3264.59 cw(c3528.89,3278.38) J1.3@3455.66,3296.15 ; 3457.5,3260.5 3523,3195 v3@3523,2969 ; J1.3 v1@3459.69,3391
  Bottom Layer w15: U3.10@3462.2,2904.98 3516.98,2904.98 3524,2912 v3@3524,2969
  Bottom Layer w20: R19.1 3334.6,3517 3460,3391.6 v1(3460,3391)
  other v3: 3523,2970
USART_RX: J3.3 R9.2 U7.9 | length 1161.7
  Top Layer w10: J3.3 2955,2994.8 2955,2586.7 2963,2578.7 v1@2963,2547
  Bottom Layer w10: R9.2 2975,2545 3000,2520 3000,2299.3 3001.84,2297.46 3001.84,2278.54 3000,2276.7 3000,2209 3013.57,2195.43 U7.9
  other v1: 2963,2545
USART_TX: J3.4 R13.2 U7.8 | length 1162.6
  Top Layer w10: J3.4 2973,3046.4 2973,2859.54 2983,2849.54 v1(2983,2591)
  Bottom Layer w10: R13.2 2988,2590 3018,2560 3018,2306.76 3019.84,2304.92 3019.84,2271.08 3018,2269.24 3018,2235 3031.98,2221.02 U7.8
V: J1.2 R20.1 T4.1 U3.9 | length 653.2
  Top Layer w20: v1@3418.64,3392 J1.2 3418.64,3258.36 3478,3199 v3@3478,2974
  Bottom Layer w20: R20.1 3341,3471 v1(3419,3393) ; U3.9@3478,2936 v3(3478,2973)
V_M: C5.2 C8.1 C9.2 R16.1 T2.1 U3.11 | length 1742.8
  Top Layer w20: v1(3006,2815) 3006,2814 3200,2620 v1(3439,2620)
  Bottom Layer w15: U3.11@3462.2,2879.39 3575.07,2879.39 C9.2@3576,2880.32
  Bottom Layer w20: v1(3006,2815) 3007,2814 C5.2 ; v1@3440,2619 3440.84,2618.16 3705.16,2618.16 3751,2664 3875,2664 3909,2698 3909,2890 3887,2912 ; C9.2@3576,2880.32 C8.1@3649.32,2880.32 ; C8.1 3776.6,2898 R16.1@3778,2896.6 ; R16.1 3809.4,2912 3887,2912 ; T2.1 3892,2912 3887,2912
W: J1.1 R21.1 T3.1 U3.7 | length 861.1
  Top Layer w20: v3@3184,2937 3333,2937 3438,3042 3438,3199.4 3380,3257.4 3380,3304 J1.1 v1@3380,3391
  Bottom Layer w15: v3(3181,2938) 3181,2931 3207.02,2904.98 U3.7@3237.8,2904.98
  Bottom Layer w20: R21.1 3347,3425 v1(3380,3392)
pads on no net: S3.0 U1.1 U1.2 U1.10 U1.12 U1.13 U1.14 U1.15 U1.16 U1.17 U1.18 U1.19 U1.20 U1.21 U1.22 U1.23 U1.24 U1.27 U1.28 U2.3 U2.4 U3.17 U4.4 U8.6 X1.3 X1.4

## Polygon pours and split planes (outlines as drawn)
GND on Top Layer "Bottom Layer-No Net" (solid, remove dead copper): 4131,3565 4129,3563 2380,3563 2380,1825 2386,1819 4131,1819 4131,3560 4134,3563
GND on Bottom Layer "Bottom Layer-No Net" (solid, remove dead copper, pour order 1001): 4133,3556.94 4125.48,3565 2379,3565 2379,1820 4130.18,1820 4130.18,3555.93 4133,3558.95

## Keep-outs
Keep-Out Layer:
  circle w5: c3255,2695 r866.14

## Other copper
Top Layer:
  rectangle net 5V: 3116,3282 3188,3309
  rectangle net 5V: 3265,2070 3336,2132
  region net 5V: 3128.17,3303.9 3136.65,3306.17 3123.09,3356.77 3114.61,3354.5
  rectangle net GND: 3004,3277 3028,3296
  rectangle net GND: 2907,2616 2942,2894
  rectangle net GND: 3171,2348 3392,2507
  rectangle net GND: 2971,2348 3193,2424
  region net GND: 3135.3,2374.17 3218.47,2463.43 3171.62,2507.09 3088.45,2417.83
  rectangle net GND: 2853,2393 3062,2436
Bottom Layer:
  rectangle net 3.3V: 3436,1932 3503,1991
  rectangle net 5V: 3116,3282 3187,3309
  rectangle net 5V: 3287,2070 3335,2130
  rectangle net GND: 3302,2921 3402,2972
  rectangle net GND: 2742,2848 2953,2883
  rectangle net GND: 2708,2415 2978,2450
  rectangle net GND: 3549,2939 3650,2997
  rectangle net GND: 3364,3028 3490,3089
  rectangle net GND: 3117,1970 3164,1993
  rectangle net GND: 2758,2214 2827,2280
  rectangle net GND: 2758,2162 2797,2246
  region net GND: 2751.31,2131.99 2797.17,2162.49 2781.11,2186.64 2735.25,2156.14
  rectangle net GND: 2703,2131 2752,2163
  rectangle net GND: 2675,2159 2780,2186
  region net GND: 2609.94,2226.87 2683.93,2155.19 2707,2179 2633.02,2250.68
  rectangle net GND: 2527,2758 2647,2845
  rectangle net GND: 2742,2407 2844,2427

## Silkscreen, mask and mechanical layers (free items; w line width, h text height)
Top Overlay:
  circle w5: c2875,2030 r90.55
  circle w5: c4010,2695 r90.55
  circle w5: c2490,2705 r90.55
  circle w5: c3600,2015 r90.55
  text "W" at 3364,3261 h30
  text "U" at 3445,3259 h30
  text "V" at 3408,3258 h30
  text "COM" at 3495,3250 h30 r315
  text "TXD" at 2864,3128 h30 r315
  text "3.3V" at 3592,3113 h30 r45
  text "RXD" at 2833,3094 h30 r315
  text "GND" at 2795,3062 h30 r315
  text "DIO" at 3633,3034 h30 r45
  text "5V" at 2763,3029 h30 r315
  text "GND" at 3721,2999 h30
  text "CLK" at 3663,2997 h30 r45
  text "LOCK" at 3081,2465 h30
  text "RST" at 3189,1853 h30
Bottom Overlay:
  lines w5: 3165,2240 3165,2390 3170,2390 ; 3205,2240 3205,2320
  text "ADC_IM" at 3693,3321 h30
  text "V_M" at 4049,2937 h30
  text "PWM" at 3984,2860 h30